# Altium PCB DAQ_1PHASE.PcbDoc
Units mm, origin at the board's own origin, x right, y up, seen from the top; angles counter-clockwise.
Board outline 55.88 x 99.06 mm, 2 copper layers (Top Layer, Bottom Layer); 38 components, 34 nets, 162 pads, 47 vias.
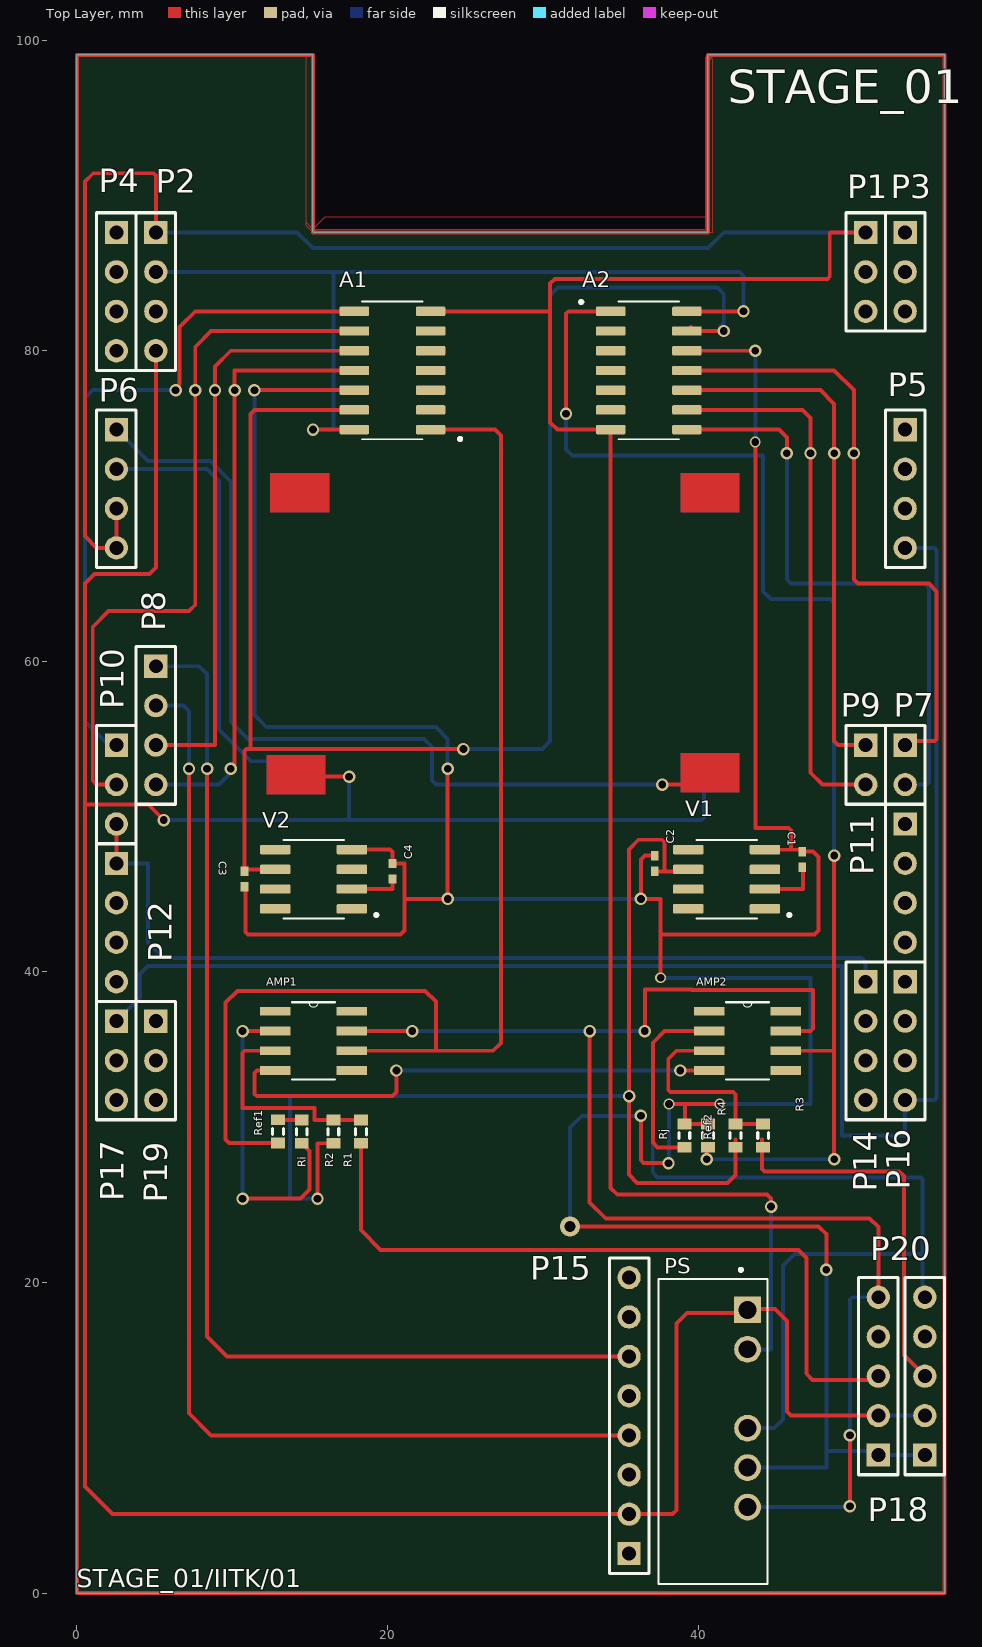
[diagram p0: Top Layer view]
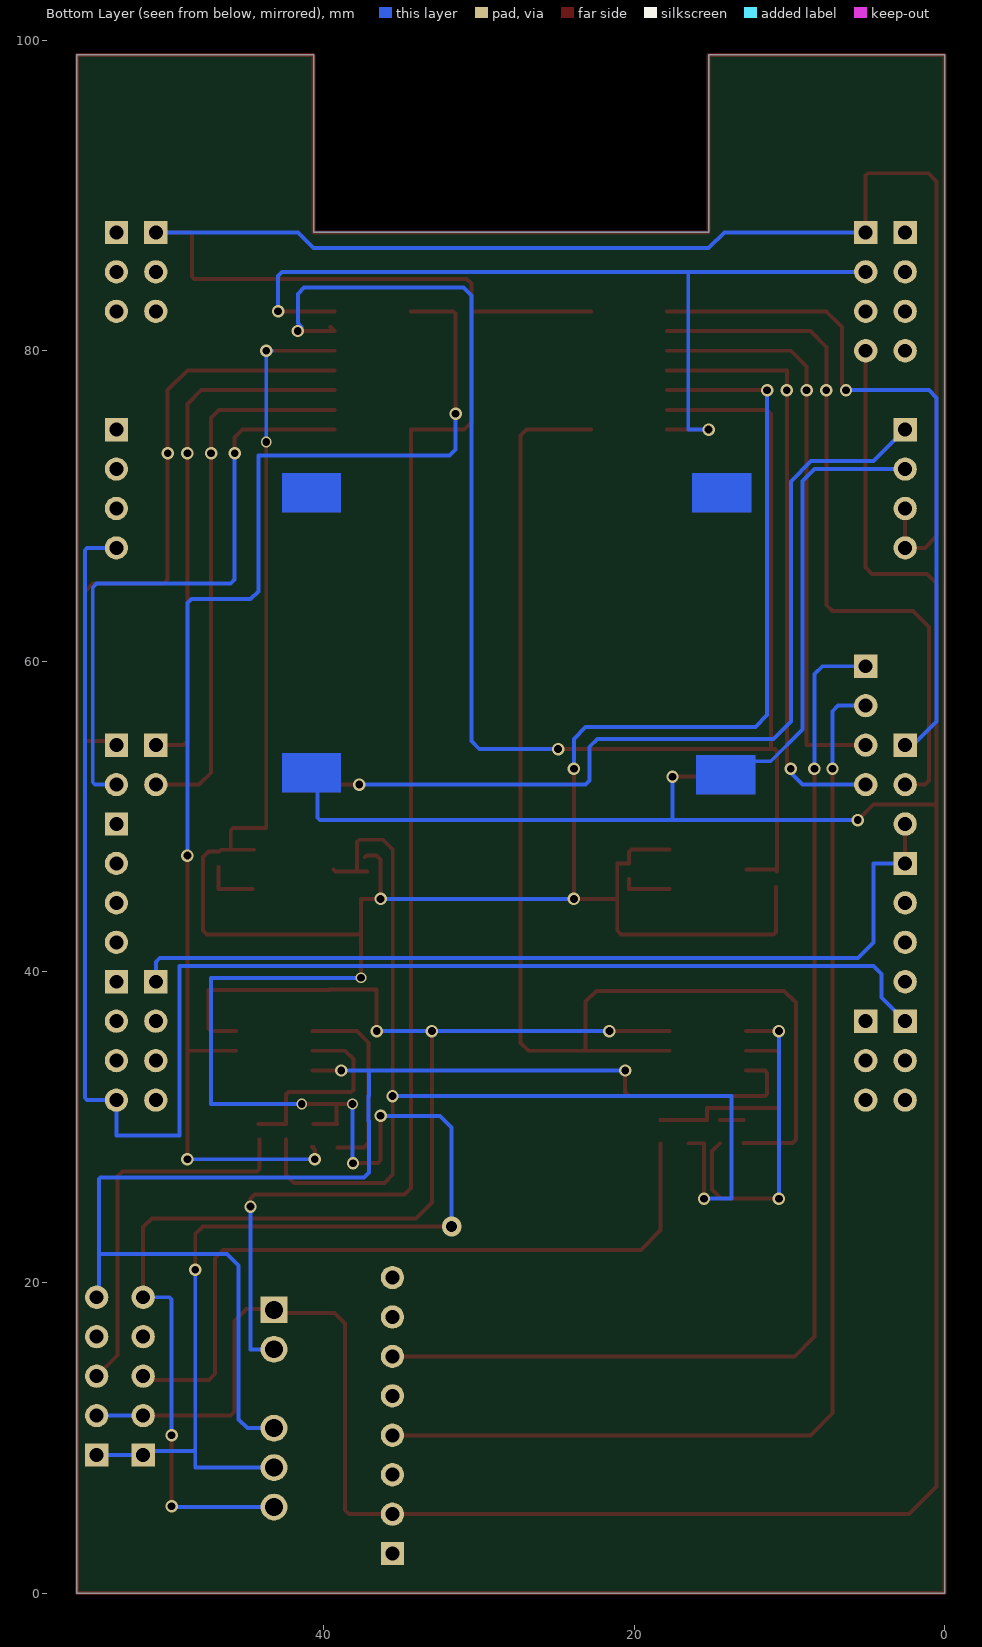
[diagram p1: Bottom Layer view, seen from below]

## Layer stack, top to bottom
Top Solder: solder mask 0.0102, Solder Resist, Dk 3.5
Top Layer: signal copper 0.0356
Dielectric 1: dielectric 0.32, FR-4, Dk 4.8
Bottom Layer: signal copper 0.0356
Bottom Solder: solder mask 0.0102, Solder Resist, Dk 3.5

## Board outline
0,0 0,99.06 15.2,99.06 15.2,87.63 40.64,87.63 40.64,99.06 55.88,99.06 55.88,0

## Design rules (kind name [scope] priority, off if disabled: settings)
Clearance [All] p1: gap=0.254 ignorepadtopadclearanceinfootprint=FALSE except(0: Arc-Hole Track-Hole SMDPad-Hole THPad-Hole Via-Hole Fill-Hole Poly-Hole Region-Hole Text-Hole)
PolygonConnect [All] p1: connectstyle=Relief reliefconductorwidth=0.254 reliefentries=4 polygonreliefangle="90 Angle" airgapwidth=0.254
RoutingVias [All] p1: holewidth=0.5 width=0.8 viastyle="Through Hole" minholewidth=0.2 minwidth=0.7 maxholewidth=0.711 maxwidth=1.27
SolderMaskExpansion [All] p1: expansion=0.102
Width [All] p1: maxlimit=1.016 minlimit=0.254 preferedwidth=0.254
30 further rules are at their usual default settings.

## Classes and differential pairs
component class Sheet3: * AMP1 AMP2 C1 C2 C3 C4 PS R1 R2 R3 R4 Ref1 Ref2 Ri Rj V1 V2
component class Sheet1: A1 A2 P1 P2 P3 P4 P5 P6 P7 P8 P9 P10 P11 P12 P14 P15 P16 P17 P18 P19 P20

## Components (designator, comment, footprint, x,y, rotation, side; value= is the part's Value field where it differs from the comment)
A1 "MCP3204-CI/SL" SOIC127P600X175-14N 20.32,78.74 r180 top
A2 "MCP3204-CI/SL" SOIC127P600X175-14N 36.83,78.74 r0 top
AMP1 "OP184FSZ-REEL7" SOIC127P600X175-8N 15.24,35.56 r0 top
AMP2 "OP184FSZ-REEL7" SOIC127P600X175-8N 43.18,35.56 r0 top
C1 "" 0402 46.717,47.249 r270 top value=50uF
C2 "" 0402 37.211,46.982 r270 top value=50uF
C3 "" 0402 10.795,45.982 r90 top value=50uF
C4 "" 0402 20.32,46.482 r270 top value=50uF
P1 "R/3/I/1" HDR1X3 50.8,87.63 r270 top locked
P2 "L/4/I/1" HDR1X4 5.08,87.63 r270 top locked
P3 "R/3/O/1" HDR1X3 53.34,87.63 r270 top locked
P4 "L/4/O/1" HDR1X4 2.54,87.63 r270 top locked
P5 "R/4/O/3" HDR1X4 53.34,74.93 r270 top locked
P6 "POWER" HDR1X4 2.54,74.93 r270 top locked
P7 "R/2/O/2" HDR1X2 53.34,54.61 r270 top locked
P8 "L/4/I/2" HDR1X4 5.08,59.69 r270 top
P9 "R/2/I/2" HDR1X2 50.8,54.61 r270 top locked
P10 "L/3/O/2" HDR1X3 2.54,54.61 r270 top locked
P11 "R/4/O/3" HDR1X4 53.34,49.53 r270 top locked
P12 "R/4/O/3" HDR1X4 2.54,46.99 r270 top locked
P14 "R/4/I/3" HDR1X4 50.8,39.37 r270 top locked
P15 "Header 8" HDR1X8 35.56,2.54 r90 top
P16 "R/4/O/3" HDR1X4 53.34,39.37 r270 top locked
P17 "L/3/O/3" HDR1X3 2.54,36.83 r270 top locked
P18 "Header 5" HDR1X5 51.616,8.89 r90 top
P19 "L/3/I/3" HDR1X3 5.08,36.83 r270 top locked
P20 "Header 5" HDR1X5 54.61,8.89 r90 top
PS "RD-0512D" CONV_RD-0512D 40.959,10.414 r270 top
R1 "Res3" J1-0603 18.288,29.718 r90 top value=2K
R2 "Res3" J1-0603 16.51,29.718 r90 top value=2K
R3 "" J1-0603 44.196,29.464 r90 top value=2K
R4 "Res3" J1-0603 42.418,29.464 r90 top value=2K
Ref1 "Res3" J1-0603 12.954,29.73 r270 top value=1K
Ref2 "Res3" J1-0603 40.64,29.464 r270 top value=1K
Ri "Res3" J1-0603 14.478,29.718 r270 top value=1K
Rj "Res3" J1-0603 39.116,29.464 r90 top value=1K
V1 "REF5025AQDRQ1" SOIC127P599X175-8N 41.84,45.974 r180 top
V2 "REF5025AQDRQ1" SOIC127P599X175-8N 15.24,45.974 r180 top

## Footprints (in the part's own frame and the unit in brackets; to place one, negate y for a bottom-side part, rotate by r counter-clockwise, add the part's x,y. Pads: shape width x height; smd on the part's side, far side on the other; paste and mask are expansions set on the pad)
0402 [mm] "Chip Capacitor, Body 1.0x0.5mm, IPC High Density"
  rect 0.6x0.5 smd: 1(-0.5,0) 2(0.5,0)
  body extent -0.55,-0.3 0.55,0.3, height 1.3
CONV_RD-0512D [mm]
  rect 1.725x1.725 hole 1.15: 1(-7.825,2.23)
  round 1.725 hole 1.15: 2(-5.285,2.23) 4(-0.205,2.23) 5(2.335,2.23) 6(4.875,2.23)
  silkscreen extent -10.5,-3.5 9.83,3.5
HDR1X2 [mm] "Connector; Header; 2 Position"
  rect 1.5x1.5 hole 0.9: 1(0,0)
  round 1.5 hole 0.9: 2(2.54,0)
  silkscreen extent -1.27,-1.27 3.81,1.27
HDR1X3 [mm] "Connector; Header; 3 Position"
  rect 1.5x1.5 hole 0.9: 1(0,0)
  round 1.5 hole 0.9: 2(2.54,0) 3(5.08,0)
  silkscreen extent -1.27,-1.27 6.35,1.27
HDR1X4 [mm] "Connector; Header; 4 Position"
  rect 1.5x1.5 hole 0.9: 1(0,0)
  round 1.5 hole 0.9: 2(2.54,0) 3(5.08,0) 4(7.62,0)
  silkscreen extent -1.27,-1.27 8.89,1.27
HDR1X5 [mm] "Connector; Header; 5 Position"
  rect 1.5x1.5 hole 0.9: 1(0,0)
  round 1.5 hole 0.9: 2(2.54,0) 3(5.08,0) 4(7.62,0) 5(10.16,0)
  silkscreen extent -1.27,-1.27 11.43,1.27
HDR1X8 [mm] "Connector; Header; 8 Position"
  rect 1.5x1.5 hole 0.9: 1(0,0)
  round 1.5 hole 0.9: 2(2.54,0) 3(5.08,0) 4(7.62,0) 5(10.16,0) 6(12.7,0) 7(15.24,0) 8(17.78,0)
  silkscreen extent -1.27,-1.27 19.05,1.27
J1-0603 [mm] "Chip Resistor, Body 1.6x0.8mm, IPC High Density"
  rect 0.7x0.9 smd: 1(-0.75,0) 2(0.75,0)
  silkscreen extent -0.2,-0.35 0.2,0.35, body extent -0.85,-0.48 0.85,0.48, height 0.9
SOIC127P599X175-8N [mm]
  rrect25% 1.97x0.6 smd: 1(-2.47,1.905) 2(-2.47,0.635) 3(-2.47,-0.635) 4(-2.47,-1.905) 5(2.47,-1.905) 6(2.47,-0.635) 7(2.47,0.635) 8(2.47,1.905)
  silkscreen extent -4.14,-2.53 1.95,2.53, body extent -2.45,-3 2.45,3, height 1.75
SOIC127P600X175-8N [mil]
  rect 78x22 smd: 1(-97,75) 2(-97,25) 3(-97,-25) 4(-97,-75) 5(97,-75) 6(97,-25) 7(97,25) 8(97,75)
  silkscreen extent -54,-98 54,98, body extent -96,-118 96,118, height 30
SOIC127P600X175-14N [mm]
  rrect25% 1.9x0.6 smd: 1(-2.455,3.81) 2(-2.455,2.54) 3(-2.455,1.27) 4(-2.455,0) 5(-2.455,-1.27) 6(-2.455,-2.54) 7(-2.455,-3.81) 8(2.455,-3.81) 9(2.455,-2.54) 10(2.455,-1.27) 11(2.455,0) 12(2.455,1.27) 13(2.455,2.54) 14(2.455,3.81)
  silkscreen extent -4.45,-4.43 1.95,4.51, body extent -3,-4.32 3,4.32, height 1.75

## Part data
A1 A2: "12 Bit Analog to Digital Converter 2, 4 Input 1 SAR 14-SOIC", Package="SOIC-14 Microchip", Availability="In Stock", Check_prices=https://www.snapeda.com/parts/MCP3204-CI/SL/Microchip/view-part/?ref=eda, MF=Microchip, MP=MCP3204-CI/SL, Price=None, Purchase-URL=https://pricing.snapeda.com/search/part/MCP3204-CI/SL/?ref=eda, SnapEDA_Link=https://www.snapeda.com/parts/MCP3204-CI/SL/Microchip/view-part/?ref=snap
AMP1 AMP2: "General Purpose Amplifier 1 Circuit Rail-to-Rail 8-SOIC", Package="SOIC-8 Analog Devices", Check_prices=https://www.snapeda.com/parts/OP184FSZ-REEL7/Analog%20Devices%20Inc./view-part/1221640/?ref=eda, Digi-Key_Part_Number=OP184FSZ-REEL7CT-ND, MF="Analog Devices", MP=OP184FSZ-REEL7, Purchase-URL=https://pricing.snapeda.com/search/part/OP184FSZ-REEL7/?ref=eda, SnapEDA_Link=https://www.snapeda.com/parts/OP184FSZ-REEL7/Analog%20Devices%20Inc./view-part/1221640/?ref=snap
C1 C2 C3 C4: library part "Cap Semi", "Capacitor (Semiconductor SIM Model)", LatestRevisionDate=29-May-2009, LatestRevisionNote="IPC-7351 Footprint Added.", PackageDescription="Chip Capacitor", PackageReference=C1206, Published=8-Jun-2000, Publisher="Altium Limited"
P1 P3 P10 P17 P19: library part "Header 3", "Header, 3-Pin", LatestRevisionDate=17-Jul-2002, LatestRevisionNote="Re-released for DXP Platform.", Publisher="Altium Limited"
P2 P4 P5 P6 P8 P11 P12 P14 P16: library part "Header 4", "Header, 4-Pin", LatestRevisionDate=17-Jul-2002, LatestRevisionNote="Re-released for DXP Platform.", Publisher="Altium Limited"
P7 P9: library part "Header 2", "Header, 2-Pin", LatestRevisionDate=17-Jul-2002, LatestRevisionNote="Re-released for DXP Platform.", Publisher="Altium Limited"
P15: "Header, 8-Pin", LatestRevisionDate=17-Jul-2002, LatestRevisionNote="Re-released for DXP Platform.", Publisher="Altium Limited"
P18 P20: "Header, 5-Pin", LatestRevisionDate=17-Jul-2002, LatestRevisionNote="Re-released for DXP Platform.", Publisher="Altium Limited"
PS: "2W DC/DC-Converter 'ECONOLINE' SIP7 1kV unreg", Package="SIP-7 Recom Power", Digi-Key_Part_Number=945-1821-5-ND, Digi-Key_Purchase_URL=https://www.digikey.com/product-detail/en/recom-power/RD-0512D-P/945-1821-5-ND/2303656?utm_source=snapeda&utm_medium=aggregator&utm_campaign=symbol, MF="Recom Power", MP=RD-0512D, SnapEDA_Link=https://www.snapeda.com/parts/RD-0512D/Recom%20Power/view-part/3631333/?ref=snap
R1 R2 R4 Ref1 Ref2 Ri Rj: "Resistor", LatestRevisionDate=29-May-2009, LatestRevisionNote="IPC-7351 Footprint Added.", PackageDescription="Chip Resistor", PackageReference=J1-0603, Published=8-Jun-2000, Publisher="Altium Limited"
R3: library part Res3, "Resistor", LatestRevisionDate=29-May-2009, LatestRevisionNote="IPC-7351 Footprint Added.", PackageDescription="Chip Resistor", PackageReference=J1-0603, Published=8-Jun-2000, Publisher="Altium Limited"
V1 V2: "Automotive, low-noise, very-low drift, precision 2.5-V series voltage reference 8-SOIC -40 to 125", Package="SOIC-8 Texas Instruments", Availability=Warning, MF="Texas Instruments", MP=REF5025AQDRQ1, Price=None, Purchase-URL=https://pricing.snapeda.com/search/part/REF5025AQDRQ1/?ref=eda, SnapEDA_Link=https://www.snapeda.com/parts/REF5025AQDRQ1/Texas%20Instruments/view-part/559984/?ref=snap

## Via types
v1: diameter 0.8, hole 0.5, Top Layer to Bottom Layer, 42 vias
v2: diameter 0.7, hole 0.5, Top Layer to Bottom Layer, 4 vias
v3: diameter 1.27, hole 0.711, Top Layer to Bottom Layer, 1 vias

## Nets (pads, with @x,y where several pads share a name; then routed paths per layer and width w, separated by ;. In a path a pad name is that pad's centre, name@x,y a point inside that pad or via, vN(x,y) a via of type N, cw(c..) or ccw(c..) an arc to the next point about the centre after c; other vN are vias at no path point)
1.8_BV: P6.2 | length 27.8
  Bottom Layer w0.254: P6.2 8.382,72.39 9.144,71.628 9.144,55.626 11.198,53.572 12.319,53.572 12.7,53.191 12.7,52.832
1PPS_A: P10.3 P12.1 P14.1 | length 57.7
  Top Layer w0.254: P12.1 P10.3
  Bottom Layer w0.254: P12.1 4.572,46.99 4.572,41.91 5.588,40.894 38.645,40.894 38.664,40.913 38.683,40.894 50.546,40.894 50.8,40.64 P14.1
1PPS_N: P15.8
3.3_BV: P6.1 | length 57.2
  Top Layer w0.254: v1(37.697,52.07) 39.624,52.07 39.878,52.324
  Bottom Layer w0.254: P6.1 4.572,72.898 8.592,72.898 9.906,71.584 9.906,56.134 11.027,55.013 22.352,55.013 22.86,54.505 22.86,52.324 23.114,52.07 v1(37.697,52.07)
3.3V: A1.14 A2.14 P2.2 | length 58.3
  Top Layer w0.254: v1@15.2,74.676 v1(15.2,74.93) 15.672,74.93 A1.14 ; A2.14 v1(42.926,82.55)
  Bottom Layer w0.254: P2.2 16.51,85.09 ; v1(15.2,74.93) 16.51,74.93 16.51,85.09 ; v1(42.926,82.55) 42.926,84.836 42.672,85.09 16.51,85.09
5V: P2.4 P15.2 P18.2 P20.2 PS.1 | length 199.4
  Top Layer w0.254: P2.4 5.08,66.04 4.677,65.637 1.121,65.637 0.508,65.024 0.508,50.8 ; v1(5.588,49.784) 4.572,50.8 0.508,50.8 ; 14.224,52.832 14.478,52.832 14.732,52.578 v1(17.526,52.578) ; PS.1 42.984,18.034 39.285,18.034 38.608,17.357 38.608,5.334 38.354,5.08 P15.2 2.286,5.08 0.508,6.858 0.508,50.8 ; PS.1@43.189,18.288 44.958,18.288 45.72,17.526 45.72,11.684 45.974,11.43 P18.2
  Bottom Layer w0.254: v1(5.588,49.784) 17.526,49.784 ; v1(17.526,52.578) 17.526,49.784 ; 40.386,52.07 40.386,49.933 40.237,49.784 17.526,49.784 ; P18.2 P20.2
+12V: AMP1.7 AMP2.7 P18.5 PS.6 | length 93.4
  Top Layer w0.254: AMP1.7 v1(21.59,36.195) ; v1(33.02,36.195) 33.02,25.146 34.055,24.111 51.035,24.111 51.054,24.13 51.616,23.568 P18.5 ; v1(36.576,36.195) 36.576,38.862 39.605,38.862 39.624,38.843 47.398,38.843 47.398,36.344 47.249,36.195 AMP2.7 ; v1(49.784,5.588) v1(49.784,10.16)
  Bottom Layer w0.254: v1(21.59,36.195) v1(33.02,36.195) v1(36.576,36.195) ; PS.6@43.238,5.588 PS.6 49.735,5.539 v1(49.784,5.588) ; v1(49.784,10.16) 49.784,18.901 49.933,19.05 P18.5
-12V: AMP1.4 AMP2.4 P20.5 PS.4 | length 86.9
  Top Layer w0.254: AMP1.4 11.579,33.655 11.43,33.506 11.43,32.153 11.579,32.004 20.32,32.004 20.574,32.258 v1(20.574,33.655) ; v1(38.862,33.655) AMP2.4
  Bottom Layer w0.254: v1(20.574,33.655) 37.084,33.655 ; v1@38.608,33.655 37.084,33.655 ; PS.4 44.909,10.619 45.466,11.176 45.466,21.082 46.228,21.844 54.461,21.844 ; P20.5 54.461,19.199 54.461,21.844 ; 37.084,33.655 37.084,32.042 37.103,32.023 37.103,30.411 37.084,30.391 37.084,27.089 37.398,26.775 54.356,26.775 54.461,26.67 54.461,21.844
A_ANALOG: P18.3 R1.1 | length 47.4
  Top Layer w0.254: R1.1 18.288,23.368 19.558,22.098 46.463,22.098 46.99,21.571 46.99,14.124 47.382,13.732 51.377,13.732 P18.3
A_ANALOG_OFF: A1.1 AMP1.6 Ref1.2 | length 83.2
  Top Layer w0.254: Ref1.2 9.806,28.98 9.576,29.21 9.576,38.024 10.338,38.786 22.428,38.786 23.114,38.1 23.114,34.925 ; AMP1.6 23.114,34.925 ; A1.1 26.924,74.93 27.305,74.549 27.305,35.433 26.797,34.925 23.114,34.925
A_CLK: A1.11 P8.4 | length 39
  Top Layer w0.254: v1(9.906,53.086) 10.16,53.34 v1(10.16,77.47) 10.16,78.74 A1.11
  Bottom Layer w0.254: P8.4 9.144,52.07 v1@10.16,53.086
A_CS: A1.8 P10.1 | length 45.7
  Top Layer w0.254: v1@6.604,77.575 6.499,77.47 v1(6.35,77.47) 6.35,77.618 6.604,77.872 6.604,81.534 7.62,82.55 A1.8
  Bottom Layer w0.254: P10.1 2.032,54.61 0.508,56.134 0.508,76.962 1.016,77.47 v1(6.35,77.47)
A_MISO: A1.10 P8.3 | length 37.6
  Top Layer w0.254: P8.3 8.89,54.61 v1(8.89,77.47) 8.89,78.994 9.906,80.01 A1.10
A_MOSI: A1.9 P10.2 | length 46
  Top Layer w0.254: P10.2 1.27,52.07 1.016,52.324 1.016,62.23 2.032,63.246 7.217,63.246 7.62,63.649 v1(7.62,77.47) 7.62,80.264 8.636,81.28 A1.9
B_ANALOG: P20.3 R3.1 | length 24.7
  Top Layer w0.254: 44.133,29.222 44.133,27.308 44.281,27.159 52.956,27.159 53.255,26.86 53.255,15.325 P20.3
B_ANALOG_OFF: A2.1 AMP2.6 Ref2.2 | length 86.1
  Top Layer w0.254: v1(31.496,75.946) 31.496,82.401 31.645,82.55 A2.1 ; v1(40.561,27.94) 40.561,28.535 40.74,28.714 Ref2.2 ; AMP2.6 48.619,34.925 ; v1(48.768,27.94) v1(48.768,47.498)
  Bottom Layer w0.254: v1(31.496,75.946) 31.496,73.66 31.899,73.257 44.196,73.257 44.196,64.516 44.704,64.008 48.514,64.008 48.768,63.754 v1(48.768,47.498) ; v1(40.561,27.94) v1(48.768,27.94)
B_CLK: A2.11 P7.1 | length 40.8
  Top Layer w0.254: A2.11 48.768,78.74 50.038,77.47 50.038,65.278 50.292,65.024 54.864,65.024 55.372,64.516 55.372,55.013 55.223,54.864 53.594,54.864 P7.1
  other v1: 50.038,73.406
B_CS: A2.8 P7.2 | length 39.3
  Top Layer w0.254: A2.8 45.212,74.93 45.72,74.422 v1(45.72,73.406)
  Bottom Layer w0.254: v1(45.72,73.406) 45.72,65.278 45.974,65.024 54.61,65.024 54.864,64.77 54.864,52.219 54.715,52.07 P7.2
B_MISO: A2.10 P9.1 | length 33.7
  Top Layer w0.254: A2.10 47.875,77.47 48.768,76.577 48.768,54.864 49.022,54.61 P9.1
  other v1: 48.768,73.406
B_MOSI: A2.9 P9.2 | length 34.9
  Top Layer w0.254: A2.9 46.736,76.2 47.244,75.692 v1(47.244,73.406) 47.244,52.832 48.006,52.07 P9.2
COM: A1.12 A2.12 C1.1 C2.1 C3.1 C4.1 P18.1 P20.1 PS.5 Ref2.1 Rj.2 V1.4 V2.4 | length 248.5
  Top Layer w0.254: C3.1@10.856,45.482 10.856,42.567 11.005,42.418 20.828,42.418 21.082,42.672 21.082,44.704 ; v1(11.43,77.47) A1.12 ; V2.4 20.171,47.879 20.32,47.73 C4.1 21.082,46.982 21.082,44.704 ; v1(23.876,53.086) v1(23.876,44.704) 21.082,44.704 ; v3(31.75,23.603) 47.771,23.603 48.26,23.114 v1(48.26,20.828) ; v1(36.322,30.734) 36.322,27.873 36.49,27.705 38.081,27.705 v1(38.1,27.686) ; v1(36.322,44.704) 36.322,47.249 36.587,47.514 37.211,47.514 C2.1@37.334,47.391 ; v1@36.49,44.704 37.6,44.704 37.592,44.696 37.592,42.418 ; v2(37.592,39.624) 37.592,42.418 ; v2(38.13,31.496) 39.154,31.496 ; A2.12 v1(43.688,80.01) ; Ref2.1 Rj.2 39.154,30.253 39.154,31.496 ; v2(41.402,31.496) 39.154,31.496 ; v2(43.688,74.138) 43.434,74.138 43.688,73.884 43.688,49.276 45.825,49.276 45.974,49.127 45.974,48.003 ; V1.4@44.466,47.871 46.595,47.871 C1.1 47.398,47.749 47.752,47.395 47.752,42.672 47.498,42.418 37.592,42.418
  Bottom Layer w0.254: v1(11.43,77.47) 11.43,56.537 12.192,55.775 23.114,55.775 23.876,55.013 v1(23.876,53.086) ; v1(23.876,44.704) v1(36.322,44.704) ; v3(31.75,23.603) 31.75,29.972 32.512,30.734 v1(36.322,30.734) ; v2(37.592,39.624) 47.244,39.624 47.244,31.496 v2(41.402,31.496) ; v1(38.1,27.686) 38.13,27.716 v2(38.13,31.496) ; PS.5 48.26,8.079 48.26,9.293 ; v2(43.688,74.138) 43.688,79.637 43.315,80.01 v1(43.688,80.01) ; v1(48.26,20.828) 48.26,9.293 ; P20.1 P18.1 51.362,9.144 48.409,9.144 48.26,9.293
GND: A1.7 A2.7 P1.1 P2.1 P6.3 P6.4 PS.2 | length 197.5
  Top Layer w0.254: P6.3 P6.4 1.27,67.31 0.508,68.072 0.508,90.898 1.05,91.44 4.931,91.44 5.08,91.291 P2.1 ; A1.7 30.48,82.55 ; A2.7 A2.7@34.366,74.93 ; v1(44.704,24.892) 44.704,25.4 44.45,25.654 34.798,25.654 34.366,26.086 A2.7@34.366,74.93 ; P1.1 48.514,87.63 48.482,87.598 48.482,84.782 48.333,84.633 30.785,84.633 30.48,84.328 30.48,82.55 ; 30.48,82.55 30.48,75.387 30.937,74.93 A2.7@34.366,74.93
  Bottom Layer w0.254: P2.1 14.184,87.63 15.2,86.614 40.64,86.614 41.656,87.63 P1.1 ; PS.2 44.704,15.699 v1(44.704,24.892)
N_RX: P8.1 P15.6 | length 73.9
  Top Layer w0.254: v1(8.382,53.086) 8.382,16.51 9.652,15.24 P15.6
  Bottom Layer w0.254: P8.1 7.874,59.69 8.382,59.182 v1(8.382,53.086)
N_TX: P8.2 P15.4 | length 76.4
  Top Layer w0.254: v1(7.217,53.086) 7.217,11.579 8.636,10.16 P15.4
  Bottom Layer w0.254: P8.2 6.858,57.15 7.217,56.791 v1(7.217,53.086)
NetAMP1_2: AMP1.2 Ri.2 | length 20.7
  Top Layer w0.254: v1(10.668,25.4) 14.389,25.4 14.986,25.997 14.986,28.46 Ri.2 ; v1(10.668,36.195) AMP1.2
  Bottom Layer w0.254: v1(10.668,25.4) v1(10.668,36.195)
NetAMP1_3: AMP1.3 R1.2 R2.2 | length 14.1
  Top Layer w0.254: AMP1.3 10.795,34.925 10.668,34.798 10.668,31.242 15.309,31.242 15.309,30.468 R2.2 R1.2
NetAMP2_2: AMP2.2 Rj.1 | length 12.5
  Top Layer w0.254: Rj.1@39.116,28.702 37.398,28.702 37.092,29.008 37.092,30.4 37.103,30.411 37.103,31.057 37.092,31.068 37.092,35.441 37.846,36.195 AMP2.2
NetAMP2_3: AMP2.3 R3.2 R4.2 | length 13
  Top Layer w0.254: AMP2.3 38.608,34.925 38.081,34.398 38.081,32.407 38.23,32.258 42.269,32.258 42.418,32.109 R4.2 R3.2
NetC1_2: C1.2 V1.2 | length 3.6
  Top Layer w0.254: V1.2@44.566,45.339 46.773,45.339 C1.2@46.773,46.752
NetC4_2: C4.2 V2.2 | length 3.3
  Top Layer w0.254: V2.2 20.32,45.339 C4.2
NetRef1_1: Ref1.1 Ri.1 | length 1.5
  Top Layer w0.254: Ref1.1 14.466,30.48 Ri.1
SCLK_A: P5.4 P16.4 P17.1 | length 106.3
  Bottom Layer w0.254: P17.1@2.54,37.338 P17.1 4.064,38.354 4.064,39.878 4.572,40.386 49.276,40.386 49.276,29.464 53.34,29.464 P16.4 55.223,31.75 55.372,31.899 55.372,67.161 55.223,67.31 P5.4
V_REF_2.5: C2.2 R2.1 R4.1 V1.6 | length 72.1
  Top Layer w0.254: v1(15.494,25.4) 15.494,28.968 R2.1 ; C2.2@37.211,46.46 37.846,46.46 ; V1.6 39.221,46.46 37.846,46.46 ; 42.418,29.222 R4.1 42.418,26.924 41.91,26.416 36.068,26.416 35.541,26.943 35.541,31.985 v1(35.56,32.004) 35.541,32.023 35.541,47.882 36.173,48.514 37.697,48.514 37.846,48.365 37.846,46.46
  Bottom Layer w0.254: v1(15.494,25.4) 13.716,25.4 13.717,25.401 13.711,32.009 13.716,32.004 v1(35.56,32.004)
V_REF_5: A1.13 A2.13 C3.2 V2.6 | length 103.3
  Top Layer w0.254: C3.2 10.906,46.593 C3.2@10.906,46.609 ; V2.6 C3.2@10.906,46.609 ; A1.13 11.43,76.2 11.176,75.946 11.176,54.356 ; v1(24.892,54.356) 11.176,54.356 ; A2.13@39.539,81.534 A2.13 v1(41.656,81.28) ; C3.2@10.906,46.609 10.841,46.609 10.795,46.655 10.795,54.229 10.922,54.356 11.176,54.356
  Bottom Layer w0.254: v1(24.892,54.356) 29.972,54.356 30.48,54.864 30.48,83.566 30.988,84.074 41.253,84.074 41.656,83.671 41.656,81.788 v1@41.402,81.534
pads on no net: A1.2 A1.3 A1.4 A1.5 A1.6 A2.2 A2.3 A2.4 A2.5 A2.6 AMP1.1 AMP1.5 AMP1.8 AMP2.1 AMP2.5 AMP2.8 P1.2 P1.3 P2.3 P3.1 P3.2 P3.3 P4.1 P4.2 P4.3 P4.4 P5.1 P5.2 P5.3 P11.1 P11.2 P11.3 P11.4 P12.2 P12.3 P12.4 P14.2 P14.3 P14.4 P15.1 P15.3 P15.5 P15.7 P16.1 P16.2 P16.3 P17.2 P17.3 P18.4 P19.1 P19.2 P19.3 P20.4 V1.1 V1.3 V1.5 V1.7 V1.8 V2.1 V2.3 V2.5 V2.7 V2.8
copper on no net: | length 353.1
  Top Layer w0.254: 0,5.08 0,25.4 ; 0,0 55.88,0 55.88,99.06 40.64,99.06 40.64,87.63 15.2,87.63 15.2,99.06 0,99.06 0,0

## Polygon pours and split planes (outlines as drawn)
no net on Bottom Layer "NONET_L02_P011" (solid, shelved, pour order 11): 0,0 0,99.06 15.2,99.06 15.2,87.63 40.64,87.63 40.64,99.06 55.88,99.06 55.88,0
no net on Top Layer "Top Layer-No Net 1" (solid, shelved, pour order 19): 14.732,99.06 14.732,88.316 15.2,87.848 15.998,88.646 40.506,88.646 40.506,98.482 41.084,99.06 55.88,99.06 55.88,0 0,0 0,99.06
no net on Top Layer "Top Layer-No Net 2" (solid, shelved, pour order 17): 10.871,78.003
no net on Top Layer "Top Layer-No Net 3" (solid, shelved, pour order 15): 0,99.06 14.732,99.06 14.732,88.098 15.2,87.63 15.418,87.848 40.506,87.848 40.506,98.926 40.64,99.06 55.88,99.06 55.88,0 0,0
no net on Top Layer "Top Layer-No Net" (solid, shelved, pour order 13): 0,99.06 15.2,99.06 15.2,87.848 15.418,87.63 40.95,87.63 40.95,98.75 40.64,99.06 55.88,99.06 55.88,0 0,0
no net on Top Layer "NONET_L01_P010" (solid, shelved, pour order 10): 0,0 0,99.06 15.2,99.06 15.2,87.63 40.64,87.63 40.64,99.06 55.88,99.06 55.88,0

## Other copper
Top Layer:
  rectangle net 5V: 12.192,51.435 16.002,53.975
  rectangle net GND: 12.446,69.596 16.256,72.136
  rectangle net 3.3_BV: 38.862,51.562 42.672,54.102
  rectangle net GND: 38.862,69.596 42.672,72.136
  region: 8.89,11.43
Bottom Layer:
  rectangle net GND: 12.446,69.596 16.256,72.136
  rectangle net 5V: 38.862,51.562 42.672,54.102
  rectangle net GND: 38.862,69.596 42.672,72.136
  rectangle net 1.8_BV: 12.192,51.435 16.002,53.975

## Silkscreen, mask and mechanical layers (free items; w line width, h text height)
Top Overlay:
  text "STAGE_01" at 41.91,95.25 h3.7
  text "STAGE_01/IITK/01" at 0,0 h2